# Altium PCB Mando_v0.PcbDoc
Units mm, origin at the board's own origin, x right, y up, seen from the top; angles counter-clockwise.
Board outline 40 x 25 mm, 2 copper layers (Top Layer, Bottom Layer), stack 1.571 mm thick; 19 components, 13 nets, 54 pads, 0 vias.
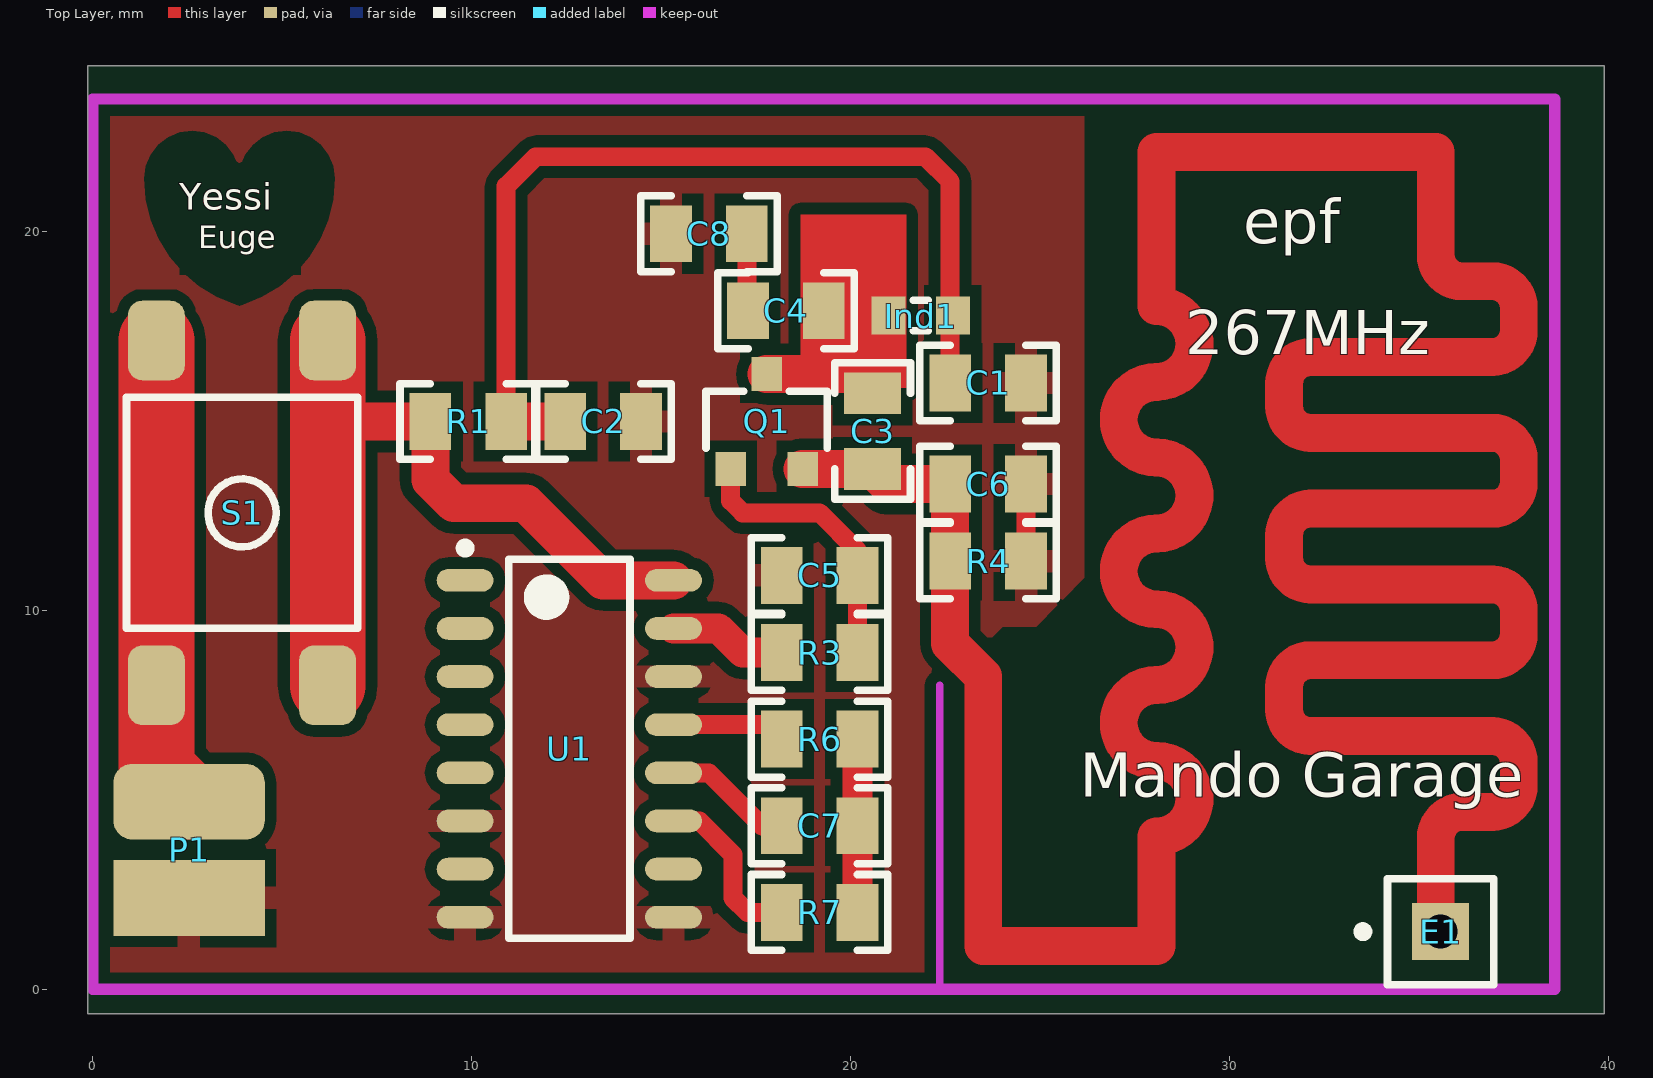
[diagram p0: Top Layer view]
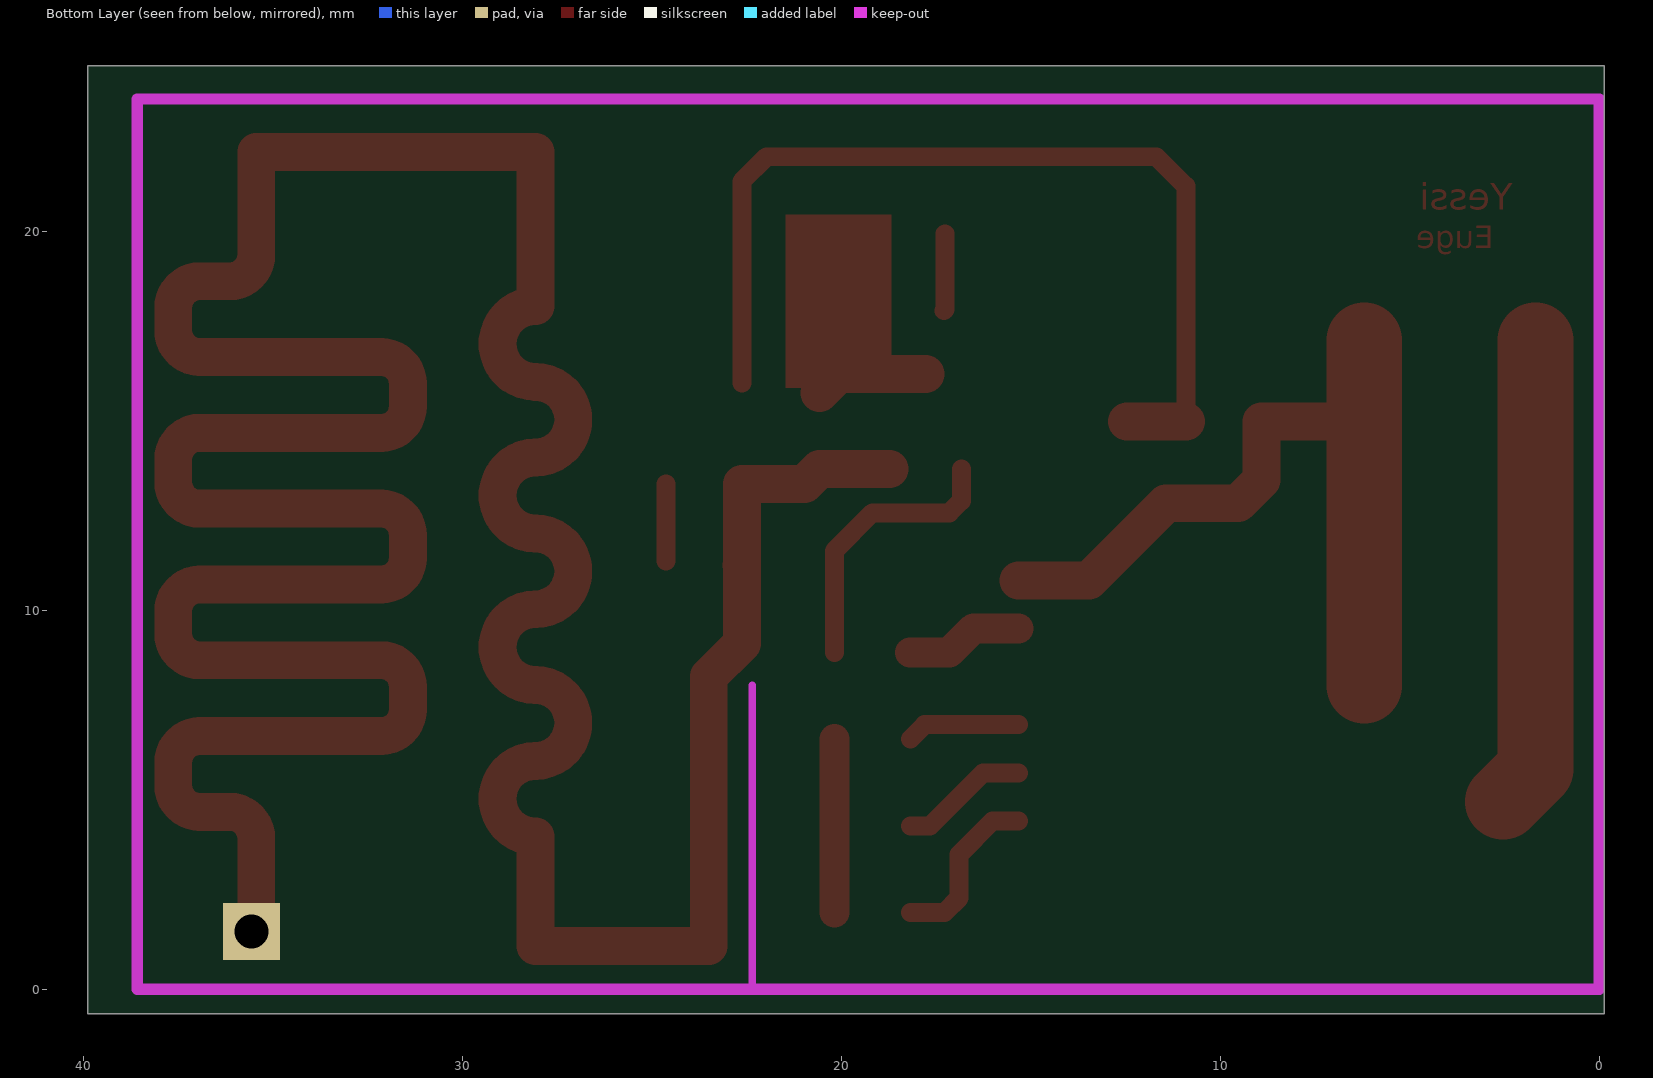
[diagram p1: Bottom Layer view, seen from below]
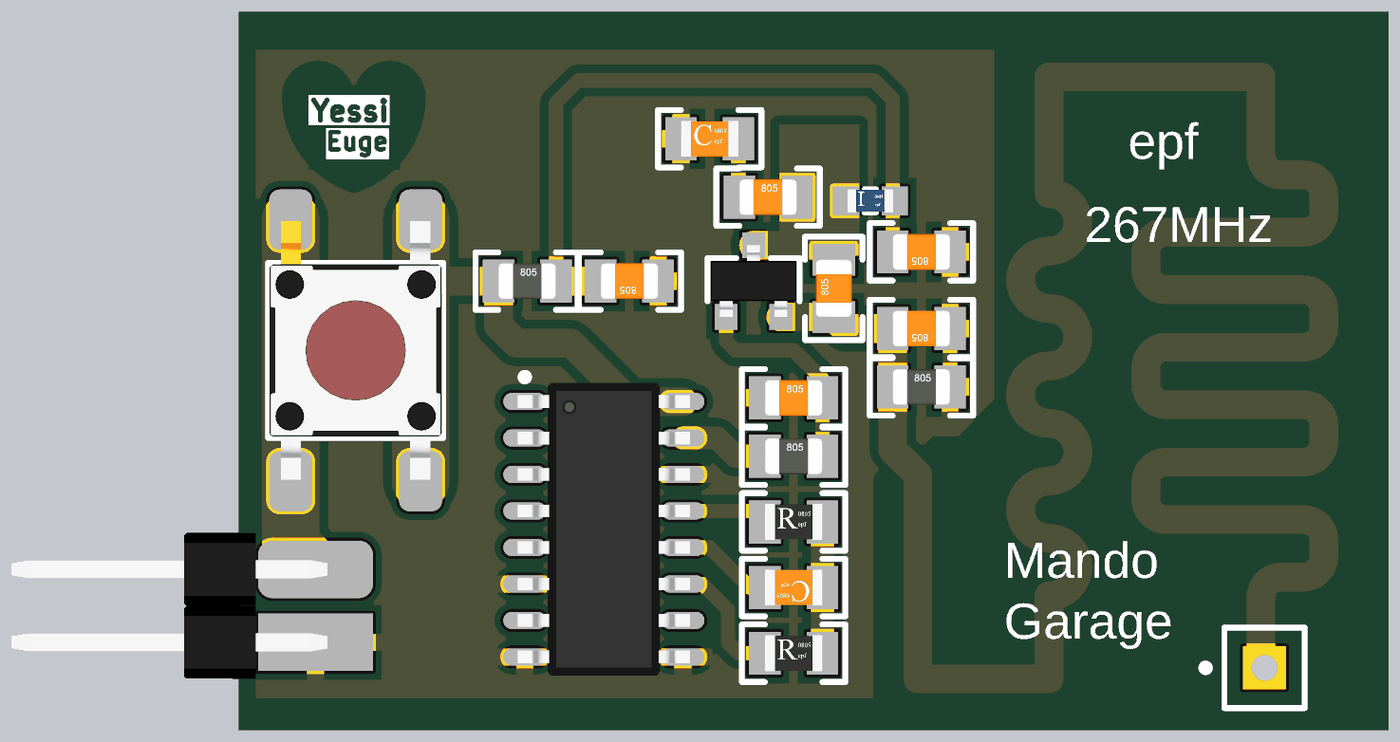
[diagram p2: 3D render of the assembled board from above, using the file's embedded part models]

## Layer stack, top to bottom
Top Layer: signal copper 0.0356
Dielectric: core 1.5, FR-4, Dk 4.8
Bottom Layer: signal copper 0.0356

## Board outline
-0.127,-0.635 39.873,-0.635 39.873,24.365 -0.127,24.365

## Design rules (kind name [scope] priority, off if disabled: settings)
Clearance [All] p1: gap=0.3
PolygonConnect [All] p1: connectstyle=Relief reliefconductorwidth=0.6 reliefentries=4 polygonreliefangle="90 Angle"
RoutingVias [All] p1: holewidth=0.6 width=1 viastyle="Through Hole" minholewidth=0.6 minwidth=1 maxholewidth=2 maxwidth=3
SilkscreenOverComponentPads [All] p1: minsilkscreentomaskgap=0.254
SolderMaskExpansion [All] p1: expansion=0.102
Width [All] p1: maxlimit=3 minlimit=0.3 preferedwidth=1
27 further rules are at their usual default settings.

## Components (designator, comment, footprint, x,y, rotation, side; value= is the part's Value field where it differs from the comment)
C1 "Capacitor" 0805_CAP 23.622,16.002 r180 top
C2 "Capacitor" 0805_CAP 13.462,14.986 r180 top
C3 "Capacitor" 0805_CAP 20.574,14.732 r90 top
C4 "Capacitor" 0805_CAP 18.288,17.907 r0 top
C5 "Capacitor" 0805_CAP 19.177,10.922 r0 top
C6 "Capacitor" 0805_CAP 23.622,13.335 r180 top
C7 "Capacitor" CAP0805 19.177,4.318 r180 top
C8 "Capacitor" CAP0805 16.256,19.939 r0 top
E1 "Antenna" PIN1 35.56,1.524 r90 top
Ind1 "Ind2" IND0603 21.844,17.78 r0 top
P1 "Header2" HeaderHx2 2.54,2.413 r90 top
Q1 "BFS17" SOT23 17.78,14.986 r0 top
R1 "Resistor" 0805_RES 9.906,14.986 r0 top
R3 "Resistor" 0805_RES 19.177,8.89 r0 top
R4 "Resistor" 0805_RES 23.622,11.303 r0 top
R6 "Resistor" RES0805 19.177,6.604 r0 top
R7 "Resistor" RES0805 19.177,2.032 r0 top
S1 "Pulsador" SW-PB6mm 3.937,12.573 r90 top
U1 "MC145026" SOIC127P602-16BN 12.573,6.35 r0 top

## Footprints (in the part's own frame and the unit in brackets; to place one, negate y for a bottom-side part, rotate by r counter-clockwise, add the part's x,y. Pads: shape width x height; smd on the part's side, far side on the other; paste and mask are expansions set on the pad)
0805_CAP [mm]
  rect 1.1x1.5 smd: 1(-1,0) 2(1,0)
  silkscreen extent -1.8,-1 1.8,1, body extent -1,-0.62 1,0.63, height 0.78
0805_RES [mm]
  rect 1.1x1.5 smd: 1(-1,0) 2(1,0)
  silkscreen extent -1.8,-1 1.8,1, body extent -1,-0.62 1,0.63, height 0.78
CAP0805 [mm]
  rect 1.1x1.5 smd: 1(-1,0) 2(1,0)
  silkscreen extent -1.8,-1 1.8,1, body extent -1,-0.62 1,0.63, height 0.5
HeaderHx2 [mm]
  rect 2x4 smd: 1(0,0)
  rrect50% 2x4 smd: 2(2.54,0)
  body extent -1.27,-0.42 3.81,10.58, height 1.6
IND0603 [mm] "Chip Resistor, Body 1.6x0.8mm, IPC Medium Density"
  rect 0.9x1 smd: 1(-0.85,0) 2(0.85,0)
  silkscreen extent -0.2,-0.4 0.2,0.4, body extent -0.8,-0.4 0.8,0.4, height 0.4
PIN1 [mm] "Generic Antenna; 1 Lead"
  rect 1.5x1.5 hole 0.9: 1(0,0)
  silkscreen extent -1.4,-1.4 1.4,2.17
RES0805 [mm]
  rect 1.1x1.5 smd: 1(-1,0) 2(1,0)
  silkscreen extent -1.8,-1 1.8,1, body extent -1,-0.62 1,0.63, height 0.5
SOIC127P602-16BN [mm] "SOIC, 16-Leads, Body 9.9x3.9mm, Pitch 1.27mm, IPC Medium Density"
  oval 1.5x0.6 smd: 1(-2.75,4.445) 2(-2.75,3.175) 3(-2.75,1.905) 4(-2.75,0.635) 5(-2.75,-0.635) 6(-2.75,-1.905) 7(-2.75,-3.175) 8(-2.75,-4.445) 9(2.75,-4.445) 10(2.75,-3.175) 11(2.75,-1.905) 12(2.75,-0.635) 13(2.75,0.635) 14(2.75,1.905) 15(2.75,3.175) 16(2.75,4.445)
  silkscreen extent -2.87,-5 1.6,5.42, body extent -3,-5.1 3,5.1, height 1.7
SOT23 [mm]
  rect 0.8x0.9 smd: 1(-0.95,-1.25) 2(0.95,-1.25) 3(0,1.25)
  silkscreen extent -1.6,-0.7 1.6,0.8, body extent -1.5,-1.25 1.5,1.25, height 1.05
SW-PB6mm [mm]
  rrect50% 2.1x1.5 smd: 1(-4.55,2.26) 2(4.55,2.26) 3(-4.55,-2.26) 4(4.55,-2.26)
  silkscreen extent -3.05,-3.05 3.05,3.05, body extent -4.5,-3 4.5,3, height 5

## Part data
C1 C2 C3 C4 C5 C6 C7 C8: library part Cap
E1: "Generic Antenna"
Q1: "NPN 1 GHz Wideband Transistor"
R1 R3 R4 R6 R7: library part Res
U1: "ENCODER"

## Nets (pads, with @x,y where several pads share a name; then routed paths per layer and width w, separated by ;. In a path a pad name is that pad's centre, name@x,y a point inside that pad or via, vN(x,y) a via of type N, cw(c..) or ccw(c..) an arc to the next point about the centre after c; other vN are vias at no path point)
GND: C1.1 C2.1 C5.1 C6.1 C8.1 P1.1 R4.2 U1.6 U1.8 U1.9 U1.14 | length 2
  Top Layer w0.5: R4.2 C6.1
NetC1_2: C1.2 C2.2 Ind1.2 R1.2 | length 25.4
  Top Layer w0.5: R1.2 10.906,21.193 11.684,21.971 21.971,21.971 22.622,21.32 C1.2
  Top Layer w1: R1.2 C2.2
NetC3_1: C3.1 C6.2 E1.1 Q1.2 R4.1 | length 115
  Top Layer w0.8: R4.1 R4.1@22.733,11.192
  Top Layer w1: Q1.2 20.57,13.736 C3.1 20.971,13.335 C6.2 R4.1 22.622,9.128 23.495,8.255 23.495,1.143 28.067,1.143 28.067,4.032 ccw(c28.067,5.032) 28.067,6.032 cw(c28.067,7.032) 28.067,8.032 ccw(c28.067,9.032) 28.067,10.032 cw(c28.067,11.032) 28.067,12.032 ccw(c28.067,13.032) 28.067,14.032 cw(c28.067,15.032) 28.067,16.032 ccw(c28.067,17.032) 28.067,18.032 28.067,22.098 35.433,22.098 35.433,19.385 ccw(c36.133,19.385) 36.133,18.685 36.923,18.685 cw(c36.923,17.985) 37.623,17.985 37.623,17.385 cw(c36.923,17.385) 36.923,16.685 32.133,16.685 ccw(c32.133,15.985) 31.433,15.985 31.433,15.385 ccw(c32.133,15.385) 32.133,14.685 36.923,14.685 cw(c36.923,13.985) 37.623,13.985 37.623,13.385 cw(c36.923,13.385) 36.923,12.685 32.133,12.685 ccw(c32.133,11.985) 31.433,11.985 31.433,11.385 ccw(c32.133,11.385) 32.133,10.685 36.923,10.685 cw(c36.923,9.985) 37.623,9.985 37.623,9.385 cw(c36.923,9.385) 36.923,8.685 32.133,8.685 ccw(c32.133,7.985) 31.433,7.985 31.433,7.385 ccw(c32.133,7.385) 32.133,6.685 36.923,6.685 cw(c36.923,5.985) 37.623,5.985 37.623,5.385 cw(c36.923,5.385) 36.923,4.685 36.133,4.685 ccw(c36.133,3.985) 35.433,3.985 35.433,1.651 E1.1
NetC3_2: C3.2 C4.2 Ind1.1 Q1.3 | length 3
  Top Layer w1: Q1.3 20.07,16.236 C3.2
NetC4_1: C4.1 C8.2 | length 2
  Top Layer w0.5: C8.2 17.256,17.939 C4.1
NetC5_2: C5.2 Q1.1 R3.2 | length 7.4
  Top Layer w0.5: Q1.1 16.83,12.888 17.145,12.573 19.177,12.573 20.177,11.573 C5.2 R3.2
NetC7_1: C7.1 R6.2 R7.2 | length 4.6
  Top Layer w0.8: R7.2 C7.1 R6.2
NetC7_2: C7.2 U1.12 | length 3.4
  Top Layer w0.5: U1.12 16.256,5.715 17.653,4.318 C7.2
NetP1_2: P1.2 S1.1 S1.2 | length 12.5
  Top Layer w2: S1.2 S1.1 1.677,5.816 P1.2
NetR3_1: R3.1 U1.15 | length 3.1
  Top Layer w0.8: U1.15 16.51,9.525 17.145,8.89 R3.1
NetR6_1: R6.1 U1.13 | length 3
  Top Layer w0.5: U1.13 17.796,6.985 R6.1
NetR7_1: R7.1 U1.11 | length 4.5
  Top Layer w0.5: U1.11 16.002,4.445 16.891,3.556 16.891,2.413 17.272,2.032 R7.1
VCC: R1.1 S1.3 S1.4 U1.16 | length 21.3
  Top Layer w1: 6.308,14.24 6.197,14.351 6.832,14.986 R1.1 8.906,13.446 9.525,12.827 11.43,12.827 13.462,10.795 U1.16
  Top Layer w2: S1.3 6.197,14.351 S1.4
pads on no net: U1.1 U1.2 U1.3 U1.4 U1.5 U1.7 U1.10

## Polygon pours and split planes (outlines as drawn)
GND on Top Layer "TGND" (solid, remove dead copper, pour order 1000): 0,0 22.86,0 22.987,0.129 22.987,8.538 24.003,9.573 24.892,9.573 26.162,10.867 26.162,23.495 0,23.495

## Keep-outs
Keep-Out Layer:
  lines w0.2: 22.352,0 22.352,8.028
  lines w0.3: 0,0 38.573,0 38.573,23.495 0,23.495 0,0

## Other copper
Top Layer:
  rectangle net NetC3_2: 18.669,15.875 21.463,20.447
  pour cut-out: 3.87,18.045 cw(c4.87,21.399) 1.37,21.399 cw(c2.62,21.399) 3.778,21.871 ccw(c3.87,21.909) 3.963,21.871 cw(c5.12,21.399) 6.37,21.399 cw(c2.87,21.399)
  text "Yessi" at 2.28,20.574 h0.7
  text "Euge" at 2.788,19.558 h0.6

## Silkscreen, mask and mechanical layers (free items; w line width, h text height)
Top Overlay:
  text "Yessi" at 2.28,20.574 h0.7
  text "Euge" at 2.788,19.558 h0.6
  text "epf" at 30.353,19.304 h2
  text "267MHz" at 28.829,16.383 h2
  text "Mando Garage" at 26.035,4.699 h2

## Dimensions
0,0 to 38.573,0 on Mechanical 1
0,0 to 0,23.495 on Mechanical 1